# Altium PCB CTA2045v1.1.PcbDoc
Units mil, origin at the board's own origin, x right, y up, seen from the top; angles counter-clockwise.
Board outline 3700.79 x 1574.8 mil, 2 copper layers (Top Layer, Bottom Layer); 23 components, 28 nets, 112 pads, 174 vias.
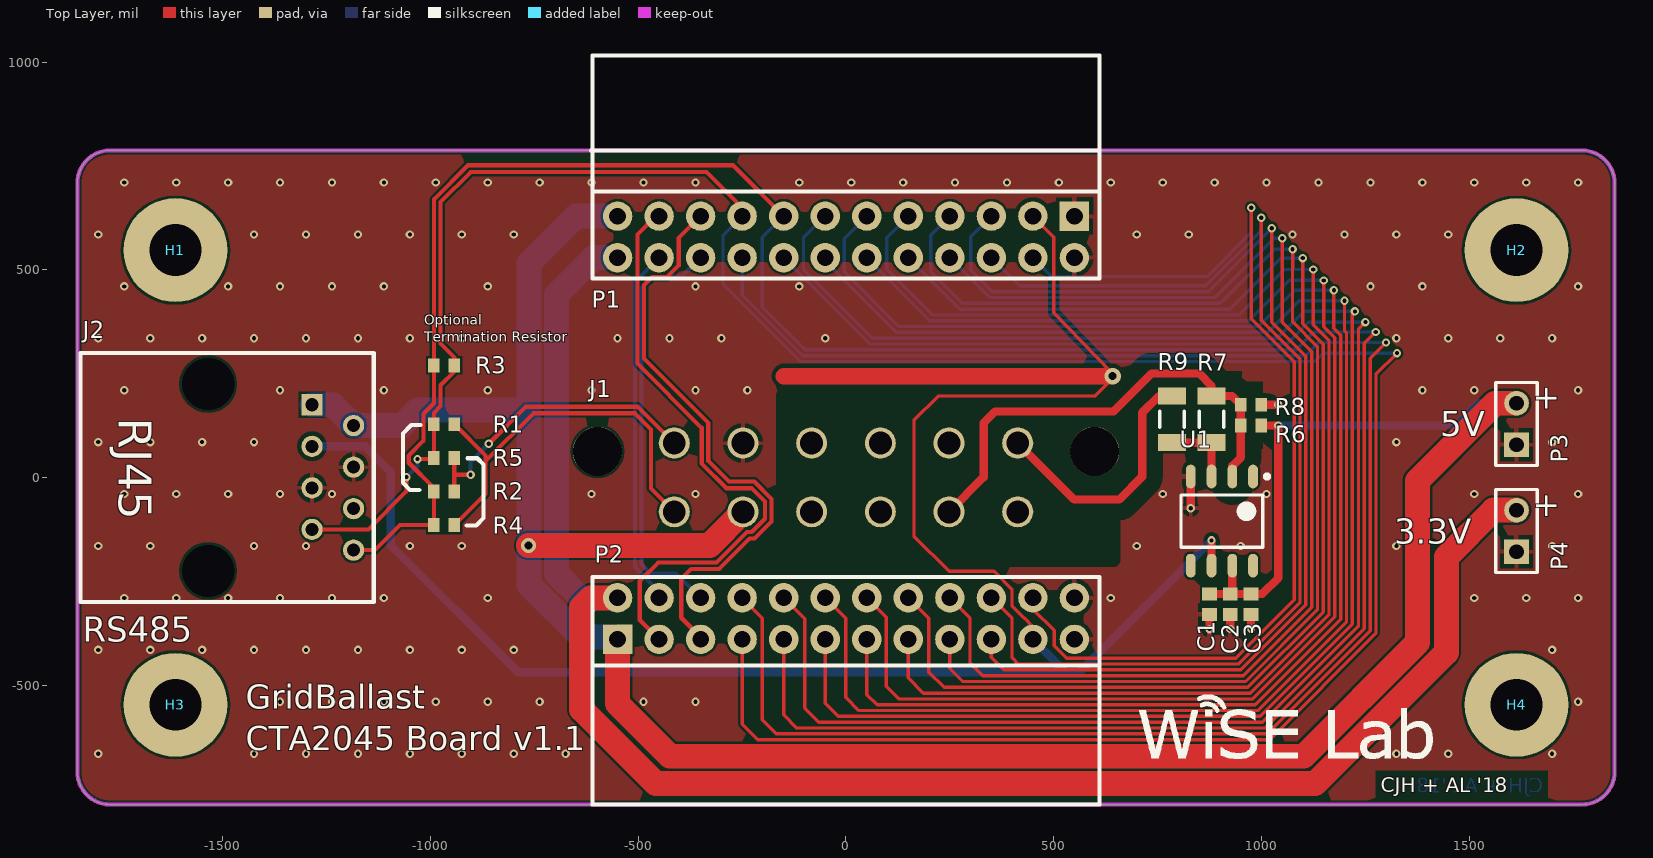
[diagram p0: Top Layer view]
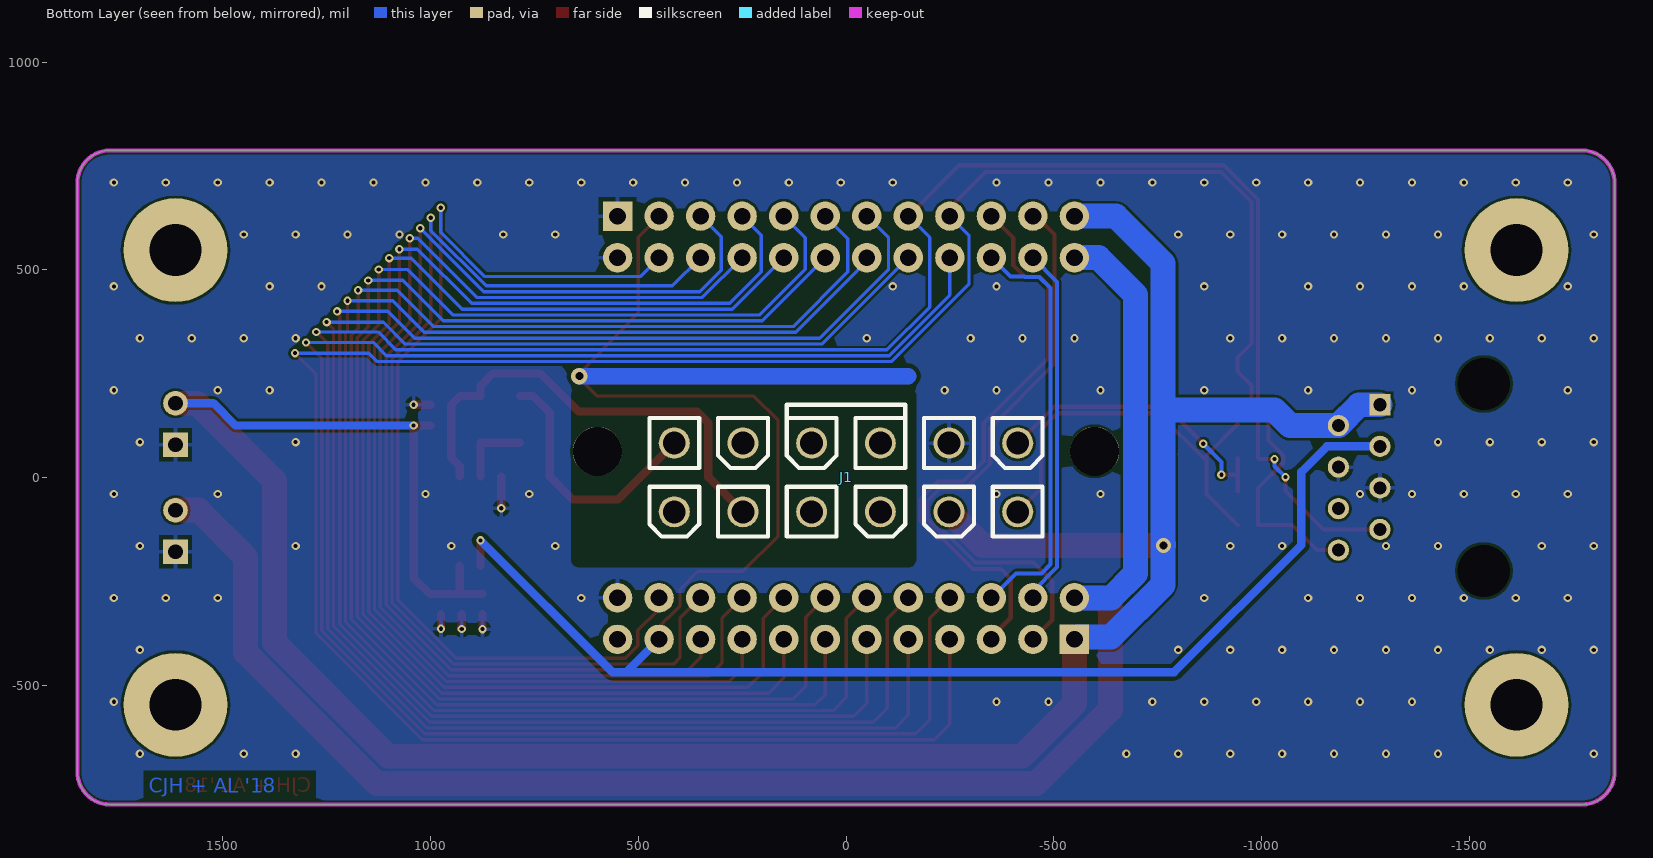
[diagram p1: Bottom Layer view, seen from below]

## Layer stack, top to bottom
Top Solder: solder mask 0.4, Solder Resist, Dk 3.5
Top Layer: signal copper 1.4
Dielectric 1: dielectric 12.6, FR-4, Dk 4.8
Bottom Layer: signal copper 1.4
Bottom Solder: solder mask 0.4, Solder Resist, Dk 3.5

## Board outline
-1771.65,787.4 1771.65,787.4 cw(c1771.65,708.66) 1850.39,708.66 1850.39,-708.66 cw(c1771.65,-708.66) 1771.65,-787.4 -1771.65,-787.4 cw(c-1771.65,-708.66) -1850.39,-708.66 -1850.39,708.66 cw(c-1771.65,708.66)

## Design rules (kind name [scope] priority, off if disabled: settings)
BoardOutlineClearance "BoardOutlineClearance - RJ45" [HasFootprint('RJ45 Unshielded PTH Connector')] p1: gap=0 ignorepadtopadclearanceinfootprint=FALSE
BoardOutlineClearance "BoardOutlineClearance - 4.2mm Pitch" [HasFootprint('2POS 4.2MM PITCH RIGHT ANGLE')] p2: gap=0 ignorepadtopadclearanceinfootprint=FALSE
BoardOutlineClearance "BoardOutlineClearance - Right Angle 0.1inch" [HasFootprint('0.1 INCH 2 ROW 24 POS FEMALE RIGHT-ANGLE HEADER SULLINS') or HasFootprint('0.1 inch 2 row 24 pos male right-angle header Sullins')] p3: gap=0 ignorepadtopadclearanceinfootprint=FALSE
BoardOutlineClearance "BoardOutlineClearance - MicroUSB" [HasFootprint('MicroUSB_TypeB')] p4: gap=0 ignorepadtopadclearanceinfootprint=FALSE
BoardOutlineClearance "BoardOutlineClearance - ESP32" [HasFootprint('ESP-WROOM-32')] p5: gap=0 ignorepadtopadclearanceinfootprint=FALSE
BoardOutlineClearance [All] p6: gap=10 ignorepadtopadclearanceinfootprint=FALSE
Clearance Clearance_1 [InNet('AC_L')] p1: gap=40 ignorepadtopadclearanceinfootprint=FALSE
Clearance Clearance_2 [InNet('AC_N')] p2: gap=40 ignorepadtopadclearanceinfootprint=FALSE
Clearance "Clearance - 60HzAnt" [InNet('60HzAnt')] p3: gap=10 ignorepadtopadclearanceinfootprint=FALSE
Clearance "Clearance - Keepout Ignore" [All vs IsKeepOut] p4: gap=0 ignorepadtopadclearanceinfootprint=FALSE
Clearance "Clearance - Antenna" [InNetClass('RF50')] p5: gap=12 ignorepadtopadclearanceinfootprint=FALSE
Clearance [All] p6: gap=6 ignorepadtopadclearanceinfootprint=FALSE
ComponentClearance "Ignore Enclosure Part" [InComponent('H1')] p1: gap=0 collisioncheckmode=3 verticalgap=0 showdistances=FALSE
DiffPairsRouting [All] p1: maxlimit=10 minlimit=6 mostfreqgap=10 toplayer_minwidth=6 toplayer_maxwidth=15 toplayer_prefwidth=10 bottomlayer_minwidth=6 bottomlayer_maxwidth=15 bottomlayer_prefwidth=10 maxuncoupledlength=500
HoleSize [All] p1: absolutevalues=TRUE maxlimit=500 minlimit=8 maxpercent=80.000 minpercent=20.000
MinimumSolderMaskSliver "MinimumSolderMaskSliver - Jumpers3" [HasFootprint('PAD-JUMPER-3-2OF3_NC_BY_TRACE_YES_SILK_FULL_BOX') vs HasFootprint('PAD-JUMPER-3-2OF3_NC_BY_TRACE_YES_SILK_FULL_BOX')] p1: minsoldermaskwidth=0
MinimumSolderMaskSliver "MinimumSolderMaskSliver - Jumpers2" [HasFootprint('PAD-JUMPER-2-NO_NO_SILK') vs HasFootprint('PAD-JUMPER-2-NO_NO_SILK')] p2: minsoldermaskwidth=0
MinimumSolderMaskSliver "MinimumSolderMaskSliver - Jumpers1" [HasFootprint('PAD-JUMPER-2-NC_BY_TRACE_NO_SILK') vs HasFootprint('PAD-JUMPER-2-NC_BY_TRACE_NO_SILK')] p3: minsoldermaskwidth=0
MinimumSolderMaskSliver "MinimumSolderMaskSliver - FTDI" [HasFootprint('PQFN5X5-32_V_FTDI_BIG_VIAS_LEADS') vs HasFootprint('PQFN5X5-32_V_FTDI_BIG_VIAS_LEADS')] p4: minsoldermaskwidth=0
MinimumSolderMaskSliver [All] p5: minsoldermaskwidth=4
NetAntennae [Not InNet('60HzAnt')] p1: netantennaetolerance=0
PolygonConnect "PolygonConnect - ViaStitching" [IsStitchingVia] p1: connectstyle=Direct reliefconductorwidth=10 reliefentries=4 polygonreliefangle="90 Angle" airgapwidth=10
PolygonConnect [All] p2: connectstyle=Relief reliefconductorwidth=10 reliefentries=4 polygonreliefangle="90 Angle" airgapwidth=10
RoutingVias [All] p1: holewidth=10 width=20 viastyle="Through Hole" minholewidth=8 minwidth=16 maxholewidth=50 maxwidth=100
ShortCircuit "ShortCircuit - FTDI" [HasFootprint('PQFN5X5-32_V_FTDI_BIG_VIAS_LEADS') and IsPad vs HasFootprint('PQFN5X5-32_V_FTDI_BIG_VIAS_LEADS') and (IsPolygon or IsRegion)] p1: allowed=TRUE
ShortCircuit ExemptJumpers [HasFootprint('PAD-JUMPER-2-NC_BY_TRACE_NO_SILK') or HasFootprint('PAD-JUMPER-3-2OF3_NC_BY_TRACE_YES_SILK_FULL_BOX')] p2: allowed=TRUE
ShortCircuit [All] p3: allowed=FALSE
SilkToSilkClearance [All] p1: silktosilkclearance=5
SilkToSolderMaskClearance [IsPad] p1: minsilkscreentomaskgap=0 clearancetoexposedcopper=TRUE
SolderMaskExpansion [All] p1: expansion=2
Width "Width - Antenna" [InNetClass('RF50')] p1: maxlimit=10000 minlimit=6 preferedwidth=10 impedancedriven=TRUE minimp=50.000000 maximp=50.000000 favimp=50.000000
Width [All] p2: maxlimit=10000 minlimit=6 preferedwidth=10 minimp=50.000000 maximp=50.000000 favimp=50.000000
22 further rules are at their usual default settings.

## Components (designator, comment, footprint, x,y, rotation, side; value= is the part's Value field where it differs from the comment)
C1 "0.1uF" "CAPC1608X09L - CAP0603" 875,-305 r90 top
C2 "1uF" "CAPC1608X09L - CAP0603" 925,-305 r90 top
C3 "10uF" "CAPC1608X09L - CAP0603" 975,-305 r90 top
H1 "1/8in Hole by 1/4in Ring Fastener" "1/8in Fastener Hole" -1614.17,547.24 r0 top locked
H2 "1/8in Hole by 1/4in Ring Fastener" "1/8in Fastener Hole" 1614.17,547.24 r0 top locked
H3 "1/8in Hole by 1/4in Ring Fastener" "1/8in Fastener Hole" -1614.17,-547.24 r0 top locked
H4 "1/8in Hole by 1/4in Ring Fastener" "1/8in Fastener Hole" 1614.17,-547.24 r0 top locked
J1 "TE 1-1586586-2" "12POS 4.2mm Pitch Vertical" 0,0 r0 bottom locked
J2 "RS485" "RJ45 Unshielded PTH Connector" -1535.43,0 r270 top locked
P1 "0.1\" Pitch, 2 Row, 24 Pos, Male Right-Angle" "0.1 inch 2 row 24 pos male right-angle header Sullins" 0,579.13 r180 top locked
P2 "0.1\" Pitch, 2 Row, 24 Pos, Female, Right-Angle" "0.1 inch 2 row 24 pos female right-angle header Sullins" 0,-339.76 r0 top locked
P3 "5V" HDR1X2 1614.17,78.74 r90 top locked
P4 "3.3V" HDR1X2 1614.17,-178.74 r90 top locked
R1 "0" "RESC1608X06L - RES0603" -967.58,128 r0 top
R2 "0" "RESC1608X06L - RES0603" -967.58,-33.86 r0 top
R3 "120" "RESC1608X06L - RES0603" -967.58,270 r180 top
R4 "0" "RESC1608X06L - RES0603" -967.58,-114.79 r0 top
R5 "0" "RESC1608X06L - RES0603" -967.58,47.07 r0 top
R6 "249R" "RESC1608X06L - RES0603" 975,125 r0 top
R7 "2k" RESC3116X06N 880,140 r90 top
R8 "249R" "RESC1608X06L - RES0603" 975,175 r180 top
R9 "150k" RESC3116X06N 785,140 r270 top
U1 "LT1818IS8#PBF" SOIC127P600X175-8N 905,-105 r270 top

## Footprints (in the part's own frame and the unit in brackets; to place one, negate y for a bottom-side part, rotate by r counter-clockwise, add the part's x,y. Pads: shape width x height; smd on the part's side, far side on the other; paste and mask are expansions set on the pad)
"0.1 inch 2 row 24 pos female right-angle header Sullins" [mm] "Sullins 0.1\" Dual row 24 position female right-angle header"
  rect 1.8x1.8 hole 1.02: 1(-13.97,-1.27)
  round 1.8 hole 1.02: 2(-13.97,1.27) 3(-11.43,-1.27) 4(-11.43,1.27) 5(-8.89,-1.27) 6(-8.89,1.27) 7(-6.35,-1.27) 8(-6.35,1.27) 9(-3.81,-1.27) 10(-3.81,1.27) 11(-1.27,-1.27) 12(-1.27,1.27) 13(1.27,-1.27) 14(1.27,1.27) 15(3.81,-1.27) 16(3.81,1.27) 17(6.35,-1.27) 18(6.35,1.27) 19(8.89,-1.27) 20(8.89,1.27) 21(11.43,-1.27) 22(11.43,1.27) 23(13.97,-1.27) 24(13.97,1.27)
  silkscreen extent -15.5,-11.37 15.5,2.54, body extent -15.49,-11.34 15.49,1.5, height 5.08
"0.1 inch 2 row 24 pos male right-angle header Sullins" [mm] "Sullins 0.1\" Dual row 24 position male right-angle header"
  rect 1.8x1.8 hole 1.02: 1(-13.97,-1.27)
  round 1.8 hole 1.02: 2(-13.97,1.27) 3(-11.43,-1.27) 4(-11.43,1.27) 5(-8.89,-1.27) 6(-8.89,1.27) 7(-6.35,-1.27) 8(-6.35,1.27) 9(-3.81,-1.27) 10(-3.81,1.27) 11(-1.27,-1.27) 12(-1.27,1.27) 13(1.27,-1.27) 14(1.27,1.27) 15(3.81,-1.27) 16(3.81,1.27) 17(6.35,-1.27) 18(6.35,1.27) 19(8.89,-1.27) 20(8.89,1.27) 21(11.43,-1.27) 22(11.43,1.27) 23(13.97,-1.27) 24(13.97,1.27)
  silkscreen extent -15.5,-11.1 15.6,2.54, body extent -15.24,-11.12 15.24,1.6, height 5.04
"1/8in Fastener Hole" [mil]
  round 250 hole 125: 1(0,0)
"12POS 4.2mm Pitch Vertical" [mm] "TE Connectivity 1-1586586-2"
  round 3 hole 3 unplated: 0(-15.2,-1.6) 0(15.2,-1.6)
  round 1.9 hole 1.4: 1(-10.5,2.1) 2(-6.3,2.1) 3(-2.1,2.1) 4(2.1,2.1) 5(6.3,2.1) 6(10.5,2.1) 7(-10.5,-2.1) 8(-6.3,-2.1) 9(-2.1,-2.1) 10(2.1,-2.1) 11(6.3,-2.1) 12(10.5,-2.1)
  silkscreen extent -12.02,-4.44 12.02,3.62
"CAPC1608X09L - CAP0603" [mm] "Chip Capacitor, 2-Leads, Body 1.60x0.80mm, IPC High Density"
  rect 0.8x0.9 smd: 1(-0.625,0) 2(0.625,0)
  body extent -0.87,-0.48 0.87,0.48, height 0.9
HDR1X2 [mm] "Connector; Header; 2 Position"
  rect 1.5x1.5 hole 0.9: 1(0,0)
  round 1.5 hole 0.9: 2(2.54,0)
  silkscreen extent -1.27,-1.27 3.81,1.27
"RESC1608X06L - RES0603" [mm] "Chip Resistor, 2-Leads, Body 1.60x0.80mm, IPC High Density"
  rect 0.7x0.85 smd: 1(-0.625,0) 2(0.625,0)
  body extent -0.87,-0.48 0.87,0.48, height 0.55
RESC3116X06N [mm] "Chip Resistor, 2-Leads, Body 3.10x1.60mm, IPC Medium Density"
  rect 1.05x1.7 smd: 1(-1.425,0) 2(1.425,0)
  silkscreen extent -0.5,-0.75 0.5,0.75, body extent -1.6,-0.85 1.6,0.85, height 0.65
"RJ45 Unshielded PTH Connector" [mm] "Amphenol 54601-908WPLF Unshielded RJ45 PTH Connector"
  round 0 hole 3.2 unplated: 0(-5.716,0) 0(5.716,0)
  rect 1.3x1.3 hole 0.8: 1(-4.444,6.35)
  round 1.3 hole 0.8: 2(-3.174,8.89) 3(-1.904,6.35) 4(-0.634,8.89) 5(0.636,6.35) 6(1.906,8.89) 7(3.176,6.35) 8(4.446,8.89)
  silkscreen extent -7.62,-7.8 7.62,10.12, body extent -7.62,-7.8 7.62,10.2, height 11.5
SOIC127P600X175-8N [mm] "SOIC, 8-Leads, Body 4.90x3.90mm, Pitch 1.27mm, IPC Medium Density"
  oval 1.45x0.6 smd: 1(-2.725,1.905) 2(-2.725,0.635) 3(-2.725,-0.635) 4(-2.725,-1.905) 5(2.725,-1.905) 6(2.725,-0.635) 7(2.725,0.635) 8(2.725,1.905)
  silkscreen extent -2.85,-2.5 1.6,2.88, body extent -2,-2.5 2,2.5, height 1.76

## Part data
C1: library part "CAP0603 0.1uF 10% 25V X7R", "SMT 0603 Ceramic Capacitor", Supplier Part Number 1=311-1341-1-ND, TempCoeff=X7R, Tolerance=10%, Voltage=25V, Supplier 1=Digi-Key, Supplier 2=Digi-Key, Supplier Part Number 2=490-1524-1-ND
C2: library part "CAP0603 1uF 10% 10V X7R", "SMT 0603 Ceramic Capacitor", Supplier Part Number 1=1276-1946-1-ND, TempCoeff=X7R, Tolerance=10%, Voltage=10V, Supplier 1=Digi-Key, Supplier 2=Digi-Key, Supplier Part Number 2=399-3118-1-ND
C3: library part "CAP0603 10uF 20% 6.3V X5R", "SMT 0603 Ceramic Capacitor", Supplier Part Number 1=587-1256-1-ND, TempCoeff=X5R, Tolerance=20%, Voltage=6.3V, Supplier 1=Digi-Key, Supplier 2=Digi-Key, Supplier Part Number 2=490-3896-1-ND
H1 H2 H3 H4: library part "1/8in by 1/4in Fastner Hole"
J1: library part "12POS 4.2mm Pitch Vertical", "TE Connectivity 1-1586586-2", Supplier Part Number 1=70041598, Supplier 1=Allied, Supplier 2=Digi-Key, Supplier Part Number 2=1-1586586-2-ND
J2: library part "RJ45 Unshielded PTH Connector", "Amphenol RJ45 Unshielded Through-Hole Connector", Colour=Black, Contact Resistance=30mR, Current Rating=1A, Flammability Rating="UL94 V-0", Insulation Resistance=500MR, Manufacturer="Amphenol FCI", Manufacturer Part Number=54601-908WPLF, Max Operating Temperature=125°C, Min Operating Temperature=-65°C, Package Quantity=200, Supplier Part Number 1=609-5081-ND, Voltage Rating=1kV, ComponentLink1Description=https://datasheet.ciiva.com/9396/c-bmj-0051-9396388.pdf, ComponentLink1URL=https://datasheet.ciiva.com/9396/c-bmj-0051-9396388.pdf, ComponentLink2Description=https://datasheet.ciiva.com/26824/getdatasheetpartid-465238-26824373.pdf, ComponentLink2URL=https://datasheet.ciiva.com/26824/getdatasheetpartid-465238-26824373.pdf, ComponentLink3Description=https://datasheet.ciiva.com/1108/c-bmj-0051-1108424.pdf, ComponentLink3URL=https://datasheet.ciiva.com/1108/c-bmj-0051-1108424.pdf, ComponentLink4Description=https://datasheet.ciiva.com/15058/c-bmj-0051-15058750.pdf, ComponentLink4URL=https://datasheet.ciiva.com/15058/c-bmj-0051-15058750.pdf, ComponentLink5Description=https://datasheet.ciiva.com/16650/c-bmj-0051-16650286.pdf, ComponentLink5URL=https://datasheet.ciiva.com/16650/c-bmj-0051-16650286.pdf, ComponentLink6Description=https://datasheet.ciiva.com/7629/c-bmj-0051-7629183.pdf, ComponentLink6URL=https://datasheet.ciiva.com/7629/c-bmj-0051-7629183.pdf, Connector Type=RJ45, Contact Material=Bronze,Copper, Contact Plating=Nickel,Gold, Depth=18mm, Direction=Down, Gender=Male, Housing Colour=Black, Housing Material=Polyamide, Lead Free="Lead Free", Length=15.24mm, Mount="Through Hole", Number of Contacts=8, Number of Ports=1, Number of Positions=8, Number of Positions Loaded=8, Number of Rows=1, Orientation="Right Angle", Packaging=Rail/Tube, Pitch=2.54mm, Pricing 2="1=0.51, 10=0.377, 50=0.377, 100=0.362, 1000=0.26, 10000=0.212 (USD)", Radiation Hardening=No, REACH SVHC="No SVHC", Shielding=Unshielded, Stock 2=0, Supplier 1=Digi-Key, Supplier 2=Mouser, Supplier Part Number 2=649-54601-908WPLF, Termination="Through Hole"
P1: library part "0.1\" 2 row 24 position male right-angle header sullins", "Sullins 0.1\" 2 row 24 position male right-angle header", Supplier Part Number 1=S2112EC-12-ND, Gender=Male, Pitch=2.54mm, Positions=24, Rows=2, Supplier 1=Digi-Key
P2: library part "0.1\" 2 row 24 position female right-angle header sullins", "Sullins 0.1\" 2 row 24 position female right-angle header", Supplier Part Number 1=S5526-ND, Pitch=2.54mm, Positions=24, Rows=2, Supplier 1=Digi-Key, Supplier 2=Digi-Key, Supplier Part Number 2=S5565-ND
P3 P4: library part "Header 2", "Header, 2-Pin", LatestRevisionDate=17-Jul-2002, LatestRevisionNote="Re-released for DXP Platform.", Publisher="Altium Limited"
R1 R2 R4 R5: library part "RES0603 0 Jumper 1/10W", "SMT 0603 Ceramic Resistor", Power=1/10W, Supplier Part Number 1=311-0.0GRCT-ND, Tolerance=Jumper, Supplier 1=Digi-Key, Supplier 2=Digi-Key, Supplier Part Number 2=P0.0GCT-ND
R3: library part "RES0603 120 1% 1/10W", "SMT 0603 Ceramic Resistor", Supplier Part Number 1=311-120HRCT-ND, Supplier 1=Digi-Key, Supplier 2=Digi-Key, Supplier 3=Digi-Key, Supplier Part Number 2=RMCF0603FT120RCT-ND, Supplier Part Number 3=YAG3563CT-ND
R6 R8: library part RC0603FR-07249RL, "RES SMD 249 OHM 1% 1/10W 0603", Case/Package=0603, Case Code (Metric)=1608, Manufacturer=Yageo, Max Operating Temperature=155°C, Max Power Dissipation=100mW, Min Operating Temperature=-55°C, Package Quantity=1, Supplier Part Number 1=311-249HRDKR-ND, Temperature Coefficient=100ppm/°C, Tolerance=1%, Voltage Rating=50V, Case Code (Imperial)=0603, ComponentLink1Description=https://datasheet.ciiva.com/2454/pyu-r-int-thick-7-2454858.pdf, ComponentLink1URL=https://datasheet.ciiva.com/2454/pyu-r-int-thick-7-2454858.pdf, ComponentLink2Description=https://datasheet.ciiva.com/2454/pyu-r-int-thick-7-2454859.pdf, ComponentLink2URL=https://datasheet.ciiva.com/2454/pyu-r-int-thick-7-2454859.pdf, ComponentLink3Description=https://datasheet.ciiva.com/2454/pyu-r-int-thick-7-2454860.pdf, ComponentLink3URL=https://datasheet.ciiva.com/2454/pyu-r-int-thick-7-2454860.pdf, Composition="Thick Film", Depth=0.8mm, Height=0.022inch, Lead Free="Lead Free", Length=0.063inch, Manufacturer Part Number=RC0603FR-07249RL, Military Standard=Not, Number of Terminations=2, Packaging="Tape and Reel", Power Rating=100mW, Pricing 1="1=0.1, 10=0.015, 100=0.006, 1000=0.00268, 2500=0.00233 (USD)", Resistance=249R, Stock 1=517619, Supplier 1=Digi-Key, Termination=SMD/SMT, Voltage Rating (DC)=50V, Width=0.031inch
R7: library part RC1206FR-072KL, "Yageo RC1206 Series Thick Film Surface Mount Resistor 1206 Case 2kO ±1% 0.25W ±100ppm/°C", Case/Package=1206, Case Code (Metric)=3216, Manufacturer=Yageo, Max Operating Temperature=155°C, Min Operating Temperature=-55°C, Power Rating=250mW, Resistance=2kR, Supplier Part Number 1=311-2.00KFRDKR-ND, Temperature Coefficient=100ppm/°C, Tolerance=1%, Voltage Rating=200V, Case Code (Imperial)=1206, ComponentLink1Description=https://datasheet.ciiva.com/11808/0900766b80c6630a-11808949.pdf, ComponentLink1URL=https://datasheet.ciiva.com/11808/0900766b80c6630a-11808949.pdf, ComponentLink2Description=https://datasheet.ciiva.com/16740/pyu-rc1206-51-rohs-l-4-16740842.pdf, ComponentLink2URL=https://datasheet.ciiva.com/16740/pyu-rc1206-51-rohs-l-4-16740842.pdf, Composition="Thick Film", Depth=1.6mm, Height=0.55mm, Lead Free="Lead Free", Length=3.1mm, Manufacturer Part Number=RC1206FR-072KL, Military Standard=Not, Mount="Surface Mount", Packaging="Tape and Reel", Pricing 1="1=0.1, 10=0.033, 100=0.0136, 1000=0.0061, 2500=0.00529 (USD)", Stock 1=842802, Supplier 1=Digi-Key, Termination=SMD/SMT, Voltage Rating (DC)=200V, Width=1.6mm
R9: library part RC1206FR-07150KL, "RES SMD 150K OHM 1% 1/4W 1206", Case/Package=1206, Case Code (Metric)=3216, Manufacturer=Yageo, Max Operating Temperature=155°C, Max Power Dissipation=250mW, Min Operating Temperature=-55°C, Package Quantity=1, Resistance=150kR, Supplier Part Number 1=311-150KFRDKR-ND, Temperature Coefficient=100ppm/°C, Tolerance=1%, Voltage Rating=200V, Case Code (Imperial)=1206, ComponentLink1Description=https://datasheet.ciiva.com/46445/444357-46445705.pdf, ComponentLink1URL=https://datasheet.ciiva.com/46445/444357-46445705.pdf, ComponentLink2Description=https://datasheet.ciiva.com/7857/444357-7857258.pdf, ComponentLink2URL=https://datasheet.ciiva.com/7857/444357-7857258.pdf, ComponentLink3Description=https://datasheet.ciiva.com/7857/444357-7857259.pdf, ComponentLink3URL=https://datasheet.ciiva.com/7857/444357-7857259.pdf, ComponentLink4Description=https://datasheet.ciiva.com/2521/pyu-rc1206-51-rohs-l-4-2521085.pdf, ComponentLink4URL=https://datasheet.ciiva.com/2521/pyu-rc1206-51-rohs-l-4-2521085.pdf, ComponentLink5Description=https://datasheet.ciiva.com/2521/pyu-rc1206-51-rohs-l-4-2521086.pdf, ComponentLink5URL=https://datasheet.ciiva.com/2521/pyu-rc1206-51-rohs-l-4-2521086.pdf, ComponentLink6Description=https://datasheet.ciiva.com/2521/pyu-rc1206-51-rohs-l-4-2521087.pdf, ComponentLink6URL=https://datasheet.ciiva.com/2521/pyu-rc1206-51-rohs-l-4-2521087.pdf, ComponentLink7Description=https://datasheet.ciiva.com/11809/0900766b80c6630a-11809439.pdf, ComponentLink7URL=https://datasheet.ciiva.com/11809/0900766b80c6630a-11809439.pdf, ComponentLink8Description=https://datasheet.ciiva.com/16769/pyu-rc1206-51-rohs-l-4-16769727.pdf, ComponentLink8URL=https://datasheet.ciiva.com/16769/pyu-rc1206-51-rohs-l-4-16769727.pdf, ComponentLink9Description=https://datasheet.ciiva.com/29181/402800-da-01-en-smd-widerstand-chip1206-150-kohm-29181403.pdf, ComponentLink9URL=https://datasheet.ciiva.com/29181/402800-da-01-en-smd-widerstand-chip1206-150-kohm-29181403.pdf, Composition="Thick Film", Depth=1.6mm, Height=0.55mm, Lead Free="Lead Free", Length=3.1mm, Manufacturer Part Number=RC1206FR-07150KL, Number of Terminations=2, Packaging="Tape and Reel", Power Rating=250mW, Pricing 1="1=0.1, 10=0.033, 100=0.0136, 1000=0.0061, 2500=0.00529 (USD)", REACH SVHC=Unknown, Stock 1=362280, Supplier 1=Digi-Key, Termination=SMD/SMT, Width=1.6mm
U1: "IC OPAMP VFB 400MHZ 8SO", Case/Package=SOIC, Input Bias Current=2uA, Input Offset Voltage (Vos)=1.5mV, Manufacturer="Linear Technology", Max Dual Supply Voltage=6.3V, Max Operating Temperature=85°C, Max Supply Voltage=12.6V, Min Dual Supply Voltage=1.75V, Min Operating Temperature=-40°C, Min Supply Voltage=3.5V, Operating Supply Current=9mA, Output Current per Channel=70mA, Package Quantity=100, Power Supply Rejection Ratio (PSRR)=78dB, Supplier Part Number 1=LT1818IS8#PBF-ND, Voltage Gain=72.04dB, Common Mode Rejection Ratio=73dB, ComponentLink1Description=https://datasheet.ciiva.com/1805/1191-1805828.pdf, ComponentLink1URL=https://datasheet.ciiva.com/1805/1191-1805828.pdf, Gain Bandwidth Product=400MHz, Lead Free="Lead Free", Manufacturer Part Number=LT1818IS8#PBF, Nominal Gain Bandwidth Product=400MHz, Number of Channels=1, Number of Circuits=1, Number of Elements=1, Number of Pins=8, Packaging=Rail/Tube, Pricing 1="1=2.36, 25=1.6728, 100=1.377 (USD)", Slew Rate=2500V/µs, Stock 1=576, Supplier 1=Digi-Key, Unity Gain Bandwidth Product=360MHz

## Via types
v1: diameter 20, hole 10, Top Layer to Bottom Layer, tented both sides, 172 vias
v2: diameter 36, hole 20, Top Layer to Bottom Layer, tented both sides, 1 vias
v3: diameter 40, hole 20, Top Layer to Bottom Layer, tented both sides, 1 vias

## Nets (pads, with @x,y where several pads share a name; then routed paths per layer and width w, separated by ;. In a path a pad name is that pad's centre, name@x,y a point inside that pad or via, vN(x,y) a via of type N, cw(c..) or ccw(c..) an arc to the next point about the centre after c; other vN are vias at no path point)
3.3V: P1.24 P2.2 P4.2 | length 4099.8
  Top Layer w60: P2.2 -613.57,-289.76 -636.52,-312.71 -636.52,-558.2 -457.52,-737.2 1129.23,-737.2 1445.41,-421.02 1445.41,-191.45 1558.12,-78.74 P4.2
  Bottom Layer w60: P2.2 -638.57,-289.76 -696.97,-231.36 -696.97,439.75 -607.59,529.13 P1.24
5V: C1.2 C2.2 C3.2 J1.2 J2.1 J2.2 P1.23 P2.1 P3.2 R6.2 U1.7 | length 6605.9
  Top Layer w20: C1.2 C2.2 ; U1.7 930,-275.39 C2.2 ; R6.2 v1(1040.79,125) 1040.79,-241.62 1002.01,-280.39 C3.2 C2.2
  Top Layer w60: v2(-764.12,-163.57) -328.92,-163.57 J1.2 ; P2.1 -550,-544.58 -423.39,-671.2 1101.89,-671.2 1375.78,-397.31 1375.78,-7.98 1562.5,178.74 P3.2
  Bottom Layer w20: v1(1040.79,125) 1469.35,125 1523.09,178.74 P3.2
  Bottom Layer w60: J2.1 -1235.43,174.96 J2.2 -1068.97,124.96 -1031.38,162.55 -764.22,162.55 -762.97,161.3 ; v2(-764.12,-163.57) v2@-764.12,-159.52 ; v2@-762.97,-163.57 -762.97,-258.7 -637.37,-384.31 -555.46,-384.31 P2.1 ; v2@-762.97,-159.52 -762.97,49.74 ; -762.97,61.3 -762.97,161.3 ; P1.23 -649.53,629.13 -762.97,515.69 -762.97,161.3
60HzAnt: J2.3 P1.3 P2.21 U1.6 | length 4516.7
  Top Layer w8: P2.21 450,-359.15 430.04,-339.2 429.52,-339.2 399.59,-309.27 399.59,-268.83 356.5,-225.74 248.13,-225.74 163.61,-141.23 163.61,137.96 221.58,195.94 598.89,195.94 v3@647.05,244.09 ; P1.3 500.39,578.75 500.39,396.77 638.6,252.89 644.5,246.75 v3@647.05,244.09 ; 548.63,237.65 548.91,237.93 ; v3(641.73,244.09) v3@647.05,244.09 ; v3@654.62,236.22 648.43,242.66 v3@647.05,244.09
  Top Layer w20: U1.6 v1(880,-151.35)
  Bottom Layer w20: J2.3 -1157.63,74.96 -1096.14,13.46 -1096.14,-162.52 -790.02,-468.64 528.88,-468.64 ; P2.21 528.88,-468.64 ; v1(880,-151.35) 562.71,-468.64 528.88,-468.64
AC_L: J1.12 R9.1 | length 621.3
  Top Layer w20: J1.12 549.22,-53.15 658.15,-53.15 713.2,1.9 713.2,155.89 753.41,196.1 R9.1
AC_N: J1.5 R6.1 R7.2 R8.2 U1.2 | length 1143.4
  Top Layer w20: J1.5 331.59,0.88 331.59,131.26 359.15,158.83 644.36,158.83 735.72,250.18 850.56,250.18 880,220.74 R7.2 929.29,196.1 R8.2 R6.1 950.39,48.54 930,28.15 U1.2
CT_N: P1.19 P2.5 | length 1414.8
  Top Layer w10: P2.5 -350,-384.28 -396.64,-337.64 -396.64,-244.51 -372.7,-220.57 -305.31,-220.57 -231.87,-147.13 -220.27,-147.13 -179.19,-106.05 -179.19,-51.62 -220.96,-9.85 -281.69,-9.85 -331.44,39.9 -331.44,131.27 -486.2,286.03 -486.2,463.22 -466.72,482.7 -430.77,482.7 -402.79,510.68 -402.79,576.35 P1.19
CT_P: P1.21 P2.3 | length 1440.8
  Top Layer w10: P2.3 -496.43,-343.33 -496.43,-249.14 -451.86,-204.57 -311.94,-204.57 -238.5,-131.13 -226.89,-131.13 -195.19,-99.43 -195.19,-58.24 -227.58,-25.85 -288.32,-25.85 -347.44,33.27 -347.44,119.51 -502.2,274.27 -502.2,585.06 -458.12,629.13 P1.21
GND: C1.1 C2.1 C3.1 J1.8 J2.4 J2.5 P1.1 P1.2 P2.23 P2.24 P3.1 P4.1 R8.1 U1.4 | length 222.8
  Top Layer w20: v1(830,-74.04) U1.4 ; v1(875,-365.16) C1.1 ; v1(925,-364.68) C2.1 ; v1(975,-364.21) C3.1 ; R8.1 v1(1040.87,175)
  other v1: -1800,-665 -1425,-665 -1300,-665 -1175,-665 -1050,-665 -925,-665 -800,-665 -675,-665 1325,-665 1450,-665 1700,-665 -1362.5,-540 -1237.5,-540 -1112.5,-540 -987.5,-540 -862.5,-540 -737.5,-540 -487.5,-540 -362.5,-540 1762.5,-540 -1800,-415 -1675,-415 -1550,-415 -1425,-415 -1300,-415 -1175,-415 -1050,-415 -925,-415 -800,-415 1700,-415 -1737.5,-290 -1612.5,-290 -1487.5,-290 -1362.5,-290 -1237.5,-290 -1112.5,-290 -862.5,-290 637.5,-290 1512.5,-290 1637.5,-290 1762.5,-290 -1800,-165 -1675,-165 -1425,-165 -1300,-165 -1050,-165 -925,-165 700,-165 950,-165 1325,-165 1700,-165 -1737.5,-40 -1612.5,-40 -1487.5,-40 -1362.5,-40 -1237.5,-40 -612.5,-40 -362.5,-40 762.5,-40 1012.5,-40 1512.5,-40 1762.5,-40 -1800,85 -1675,85 -1550,85 -1425,85 1325,85 1700,85 -1737.5,210 -1362.5,210 -1112.5,210 -862.5,210 -612.5,210 -362.5,210 -237.5,210 1387.5,210 1512.5,210 1762.5,210 -1800,335 -1675,335 -1550,335 -1425,335 -1300,335 -1175,335 -1050,335 -925,335 -550,335 -425,335 -300,335 -50,335 1325,335 1450,335 1575,335 1700,335 -1737.5,460 -1487.5,460 -1362.5,460 -1237.5,460 -1112.5,460 -862.5,460 -362.5,460 -112.5,460 1262.5,460 1387.5,460 1762.5,460 -1800,585 -1425,585 -1300,585 -1175,585 -1050,585 -925,585 -800,585 700,585 825,585 1075,585 1200,585 1325,585 1450,585 -1737.5,710 -1612.5,710 -1487.5,710 -1362.5,710 -1237.5,710 -1112.5,710 -987.5,710 -862.5,710 -737.5,710 -612.5,710 -487.5,710 -362.5,710 -112.5,710 12.5,710 137.5,710 262.5,710 387.5,710 512.5,710 637.5,710 762.5,710 887.5,710 1012.5,710 1137.5,710 1262.5,710 1387.5,710 1512.5,710 1637.5,710 1762.5,710
GPIO1: P1.18 P2.8 | length 4317.8
  Top Layer w8: P2.8 -201.31,-338.46 -201.31,-583.69 -167.8,-617.2 1014.06,-617.2 1261.71,-369.54 1261.71,286.52 v1(1300.16,324.97)
  Bottom Layer w8: P1.18 -250,439.13 -104.14,293.26 1106.38,293.26 1138.17,325.05 1138.25,324.97 v1(1300.16,324.97)
GPIO2: P1.16 P2.10 | length 3976.2
  Top Layer w8: P2.10 -99.26,-340.5 -99.26,-555.09 -65.15,-589.2 1002.46,-589.2 1233.71,-357.94 1233.71,357.16 v1(1250.39,373.84)
  Bottom Layer w8: P1.16 57.87,321.26 1060.84,321.26 1113.42,373.84 v1(1250.39,373.84)
GPIO3: P1.14 P2.12 | length 3703.1
  Top Layer w8: P2.12 -0.9,-338.86 -0.9,-529.12 31.18,-561.2 990.86,-561.2 1204.97,-347.09 1204.97,347.97 1200.08,352.86 v1(1200.08,425.24)
  Bottom Layer w8: P1.14 -50,520.31 121.05,349.26 1015.3,349.26 1091.28,425.24 v1(1200.08,425.24)
GPIO4: P1.12 P2.14 | length 3431.2
  Top Layer w8: P2.14 97.13,-336.89 97.13,-503.02 127.3,-533.2 979.27,-533.2 1176.97,-335.49 1176.97,336.37 1149.99,363.35 v1(1149.99,474.38)
  Bottom Layer w8: P1.12 201.87,377.26 969.77,377.26 1066.88,474.38 v1(1149.99,474.38)
GPIO5: P1.10 P2.16 | length 3163.1
  Top Layer w8: P2.16 199.43,-339.19 199.43,-468.56 236.06,-505.2 967.67,-505.2 1148.97,-323.89 1148.97,320.19 1099.58,369.59 v1(1099.58,527.96)
  Bottom Layer w8: P1.10 273.87,405.26 924.23,405.26 1046.92,527.96 v1(1099.58,527.96)
GPIO6: P1.8 P2.18 | length 2896.4
  Top Layer w8: P2.18 298.5,-338.26 298.5,-445.95 329.75,-477.2 956.07,-477.2 1120.97,-312.3 1120.97,302.57 1050.12,373.42 v1(1050.12,575.83)
  Bottom Layer w8: P1.8 345.87,433.26 888.73,433.26 1031.3,575.83 v1(1050.12,575.83)
GPIO7: P1.6 P2.20 | length 2654.7
  Top Layer w8: P2.20 399.72,-339.49 399.72,-434.59 414.32,-449.2 944.47,-449.2 1092.97,-300.7 1092.97,284.94 999.81,378.1 v1(999.81,625.28)
  Bottom Layer w8: P1.6 417.87,461.26 866.6,461.26 999.81,594.47 v1(999.81,625.28)
GPIO8: P1.4 P2.22 | length 2419.8
  Top Layer w8: P2.22 450,-316.99 501.25,-368.24 501.25,-405.27 531.18,-435.2 938.67,-435.2 1078.97,-294.9 1078.97,278.33 975.75,381.55 v1(975.75,649.34)
  Bottom Layer w8: P1.4 495.43,483.7 869.24,483.7 975.75,590.21 v1(975.75,649.34)
I2C_SCL: P1.20 P2.6 | length 1013.1
  Bottom Layer w10: P2.6 -408.85,-230.91 -470.36,-230.91 -492.24,-209.03 -492.24,455.76 -465.3,482.7 -430.77,482.7 -429.97,483.5 -395.64,483.5 P1.20
I2C_SDA: P1.22 P2.4 | length 867.1
  Bottom Layer w10: P2.4 -450,-274.16 -508.24,-215.92 -508.24,470.89 P1.22
Leak_N: P1.11 P2.13 | length 3594.6
  Top Layer w8: P2.13 50,-522.55 74.65,-547.2 985.06,-547.2 1190.97,-341.29 1190.97,342.17 1174.4,358.74 v1(1174.4,450.6)
  Bottom Layer w8: P1.11 -4.57,574.57 -4.57,494.68 126.85,363.26 992.53,363.26 1079.87,450.6 v1(1174.4,450.6)
Leak_P: P1.13 P2.11 | length 3855.9
  Top Layer w8: P2.11 -50,-543.56 -18.37,-575.2 996.66,-575.2 1218.97,-352.89 1218.97,393.72 v1(1225.13,399.87)
  Bottom Layer w8: P1.13 -102.51,576.62 -102.51,501.45 63.67,335.26 1038.07,335.26 1102.68,399.87 v1(1225.13,399.87)
Mic_In: P1.9 P2.15 | length 3313.1
  Top Layer w8: P2.15 150,-482.67 186.53,-519.2 973.47,-519.2 1162.97,-329.69 1162.97,329.01 1124.94,367.04 v1(1124.94,500.69)
  Bottom Layer w8: P1.9 97.96,577.1 97.96,500.97 207.67,391.26 947,391.26 1056.43,500.69 v1(1124.94,500.69)
NetR7_1: R7.1 R9.2 U1.3 | length 176.6
  Top Layer w20: R9.2 R7.1 U1.3
RFU1: P1.7 P2.17 | length 3041.9
  Top Layer w8: P2.17 250,-459.91 281.29,-491.2 961.87,-491.2 1134.97,-318.09 1134.97,314.39 1074.99,374.37 1074.99,504.38 1075.16,504.55 v1(1075.16,549.52)
  Bottom Layer w8: P1.7 204.15,583.28 204.15,494.79 279.67,419.26 901.46,419.26 1031.71,549.52 v1(1075.16,549.52)
RFU2: P1.5 P2.19 | length 2778.6
  Top Layer w8: P2.19 350,-432.84 380.36,-463.2 950.27,-463.2 1106.97,-306.5 1106.97,291.85 1024.78,374.05 v1@1024.78,599.93
  Bottom Layer w8: P1.5 300.05,579.19 300.05,498.88 351.67,447.26 872.4,447.26 v1(1025.07,599.93)
RS485_1: J1.1 R1.2 R4.2 | length 988.6
  Top Layer w10: R4.2 -867.64,-39.47 -867.64,39.23 ; R1.2 -867.64,52.67 -867.64,39.23 ; J1.1 -469.58,-26.49 -469.58,115.66 -508.32,154.41 -752.47,154.41 -867.64,39.23
RS485_2: J1.7 R2.2 R5.2 | length 732.8
  Top Layer w10: R2.2 -942.97,6.6 ; R5.2 -942.97,6.6 ; v1(-903.68,6.6) -942.97,6.6 ; v1(-859.98,81.22) -770.8,170.41 -501.69,170.41 -413.96,82.68 J1.7
  Bottom Layer w10: v1(-903.68,6.6) -903.68,37.52 v1(-859.98,81.22)
RS4855_A: J2.8 P1.15 P2.9 R2.1 R3.2 R4.1 | length 6173.8
  Top Layer w8: P2.9 -150,-571.77 -118.57,-603.2 1008.26,-603.2 1247.71,-363.74 1247.71,322.73 v1(1275.19,350.21)
  Top Layer w10: J2.8 -1133.94,-175.04 -1073.69,-114.79 R4.1 R2.1 -992.18,-25 -1052.63,35.45 -1052.63,52.84 -1016.95,88.52 -1016.95,106.71 -1016.96,153.41 -991.82,178.56 -991.82,669.6 -909.85,751.57 -272.44,751.57 P1.15
  Bottom Layer w8: P1.15 -201.41,577.72 -201.41,410.34 -98.34,307.26 1083.61,307.26 1126.56,350.21 v1(1275.19,350.21)
RS4855_B: J2.7 P1.17 P2.7 R1.1 R3.1 R5.1 | length 6297.2
  Top Layer w8: P2.7 -250,-593.66 -212.47,-631.2 1019.86,-631.2 1275.71,-375.34 1275.71,248.51 v1(1326.59,299.38)
  Top Layer w10: J2.7 -1149.91,-125.04 -1057.93,-33.07 v1(-1057.93,0.71) ; v1(-1031.63,44.15) -995.11,44.15 R5.1 R1.1 -992.18,155.56 -975.82,171.93 -975.82,221.99 -942.22,255.58 -942.22,288.53 -975.82,322.13 -975.82,662.98 -903.22,735.57 -335.92,735.57 -250,649.66 P1.17 ; P2.7 P2.7@-250,-387.16
  Bottom Layer w8: P1.17 -295.95,583.19 -295.95,465.28 -109.94,279.26 1129.15,279.26 1149.27,299.38 v1(1326.59,299.38)
  Bottom Layer w10: v1(-1057.93,0.71) -1031.63,27.02 v1(-1031.63,44.15)
pads on no net: H1.1 H2.1 H3.1 H4.1 J1.0 J1.3 J1.4 J1.6 J1.9 J1.10 J1.11 J2.0 J2.6 U1.1 U1.5 U1.8

## Polygon pours and split planes (outlines as drawn)
GND on Top Layer "Top Layer-GND" (solid, remove dead copper, pour order 0): -1771.65,787.4 1771.65,787.4 cw(c1771.65,708.66) 1850.39,708.66 1850.39,-708.66 cw(c1771.65,-708.66) 1771.65,-787.4 -1771.65,-787.4 cw(c-1771.65,-708.66) -1850.39,-708.66 -1850.39,708.66 cw(c-1771.65,708.66)
GND on Bottom Layer "Bottom Layer-GND" (solid, remove dead copper, pour order 1): -1771.65,787.4 1771.65,787.4 cw(c1771.65,708.66) 1850.39,708.66 1850.39,-708.66 cw(c1771.65,-708.66) 1771.65,-787.4 -1771.65,-787.4 cw(c-1771.65,-708.66) -1850.39,-708.66 -1850.39,708.66 cw(c-1771.65,708.66)

## Keep-outs
Keep-Out Layer:
  the board outline again, w10

## Other copper
Top Layer:
  text "CJH + AL '18" at 1287.23,-758.2 h35
Bottom Layer:
  text "CJH + AL '18" at 1678.47,-758.47 h35
Multi-Layer:
  pour cut-out: -149.21,216.54 641.73,216.54 cw(c641.73,196.85) 661.42,196.85 661.42,-196.85 cw(c641.73,-196.85) 641.73,-216.54 -149.21,-216.54 cw(c-149.21,-196.86) -168.89,-196.86 -168.89,196.86 cw(c-149.21,196.86)
  lines w40 net 60HzAnt: -149.21,244.09 641.65,244.09

## Silkscreen, mask and mechanical layers (free items; w line width, h text height)
Top Overlay:
  drawing of 1299 lines, arcs and shapes, not listed
  text "Optional / Termination Resistor" at -1015.04,318.85 h40
  text "+" at 1730,157.11 h100 r90
  text "+" at 1730,-101.4 h100 r90
  text "GridBallast / CTA2045 Board v1.1" at -1445.36,-675.59 h100
  text "CJH + AL '18" at 1287.23,-758.2 h35

## Dimensions
1850.39,-708.66 to -1850.39,-708.66 on Mechanical 1
-1771.65,787.4 to -1771.65,-787.4 on Mechanical 1

## Text inside footprints (layer, text, board x,y; h text height)
J1: Mechanical 1 "Conn. Mounts Upward" at -545,260 h60 r180
J2: Top Overlay "RJ45" at -1751.05,143.72 h78.74 r270
P1: Mechanical 1 "5.29MM / FROM / CENTER" at -88,964.87 h39.37 r270
P2: Mechanical 1 "11.37MM / FROM / CENTER" at 88,-725.5 h39.37 r90